# Altium PCB PCB_TLV3502.pcbdoc
Units mil, origin at the board's own origin, x right, y up, seen from the top; angles counter-clockwise.
Board outline 4512.5 x 3365 mil, 2 copper layers (Top Layer, Bottom Layer); 31 components, 17 nets, 89 pads, 22 vias.
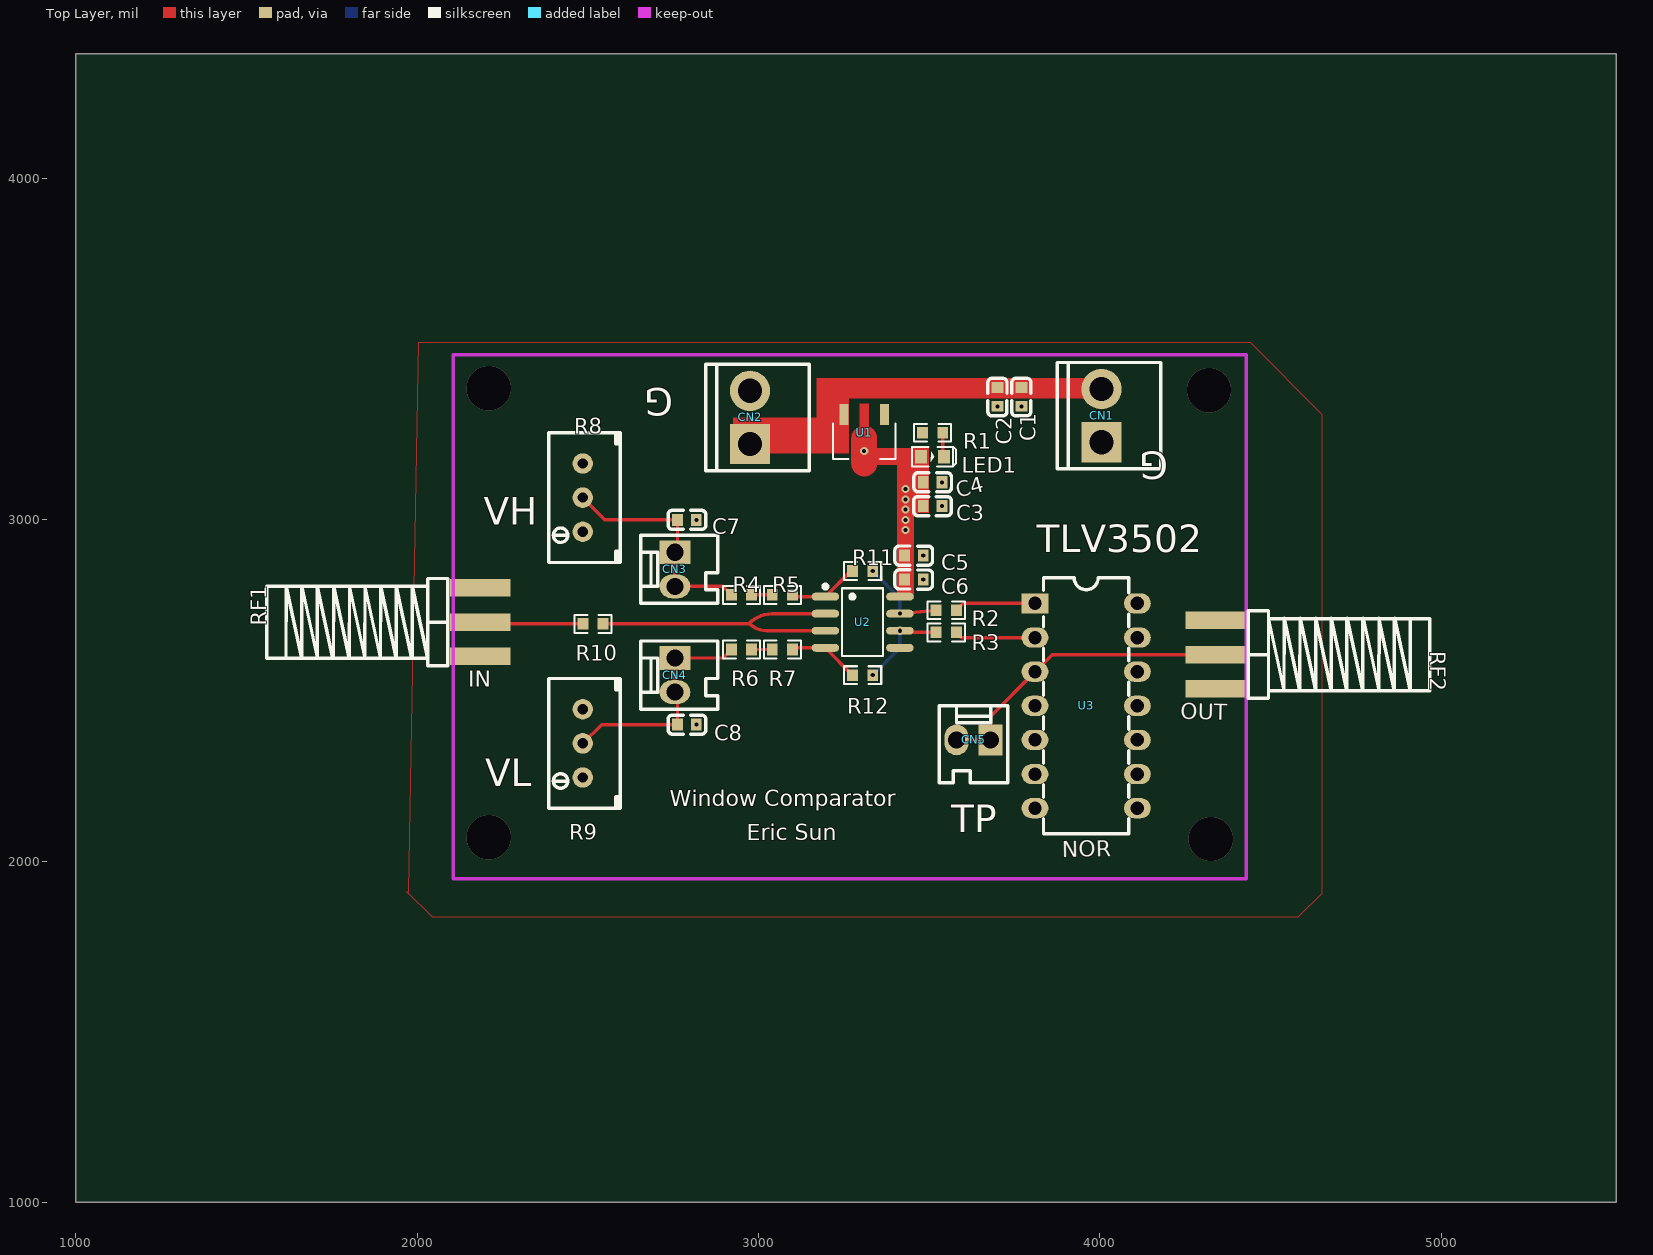
[diagram p0: Top Layer view]
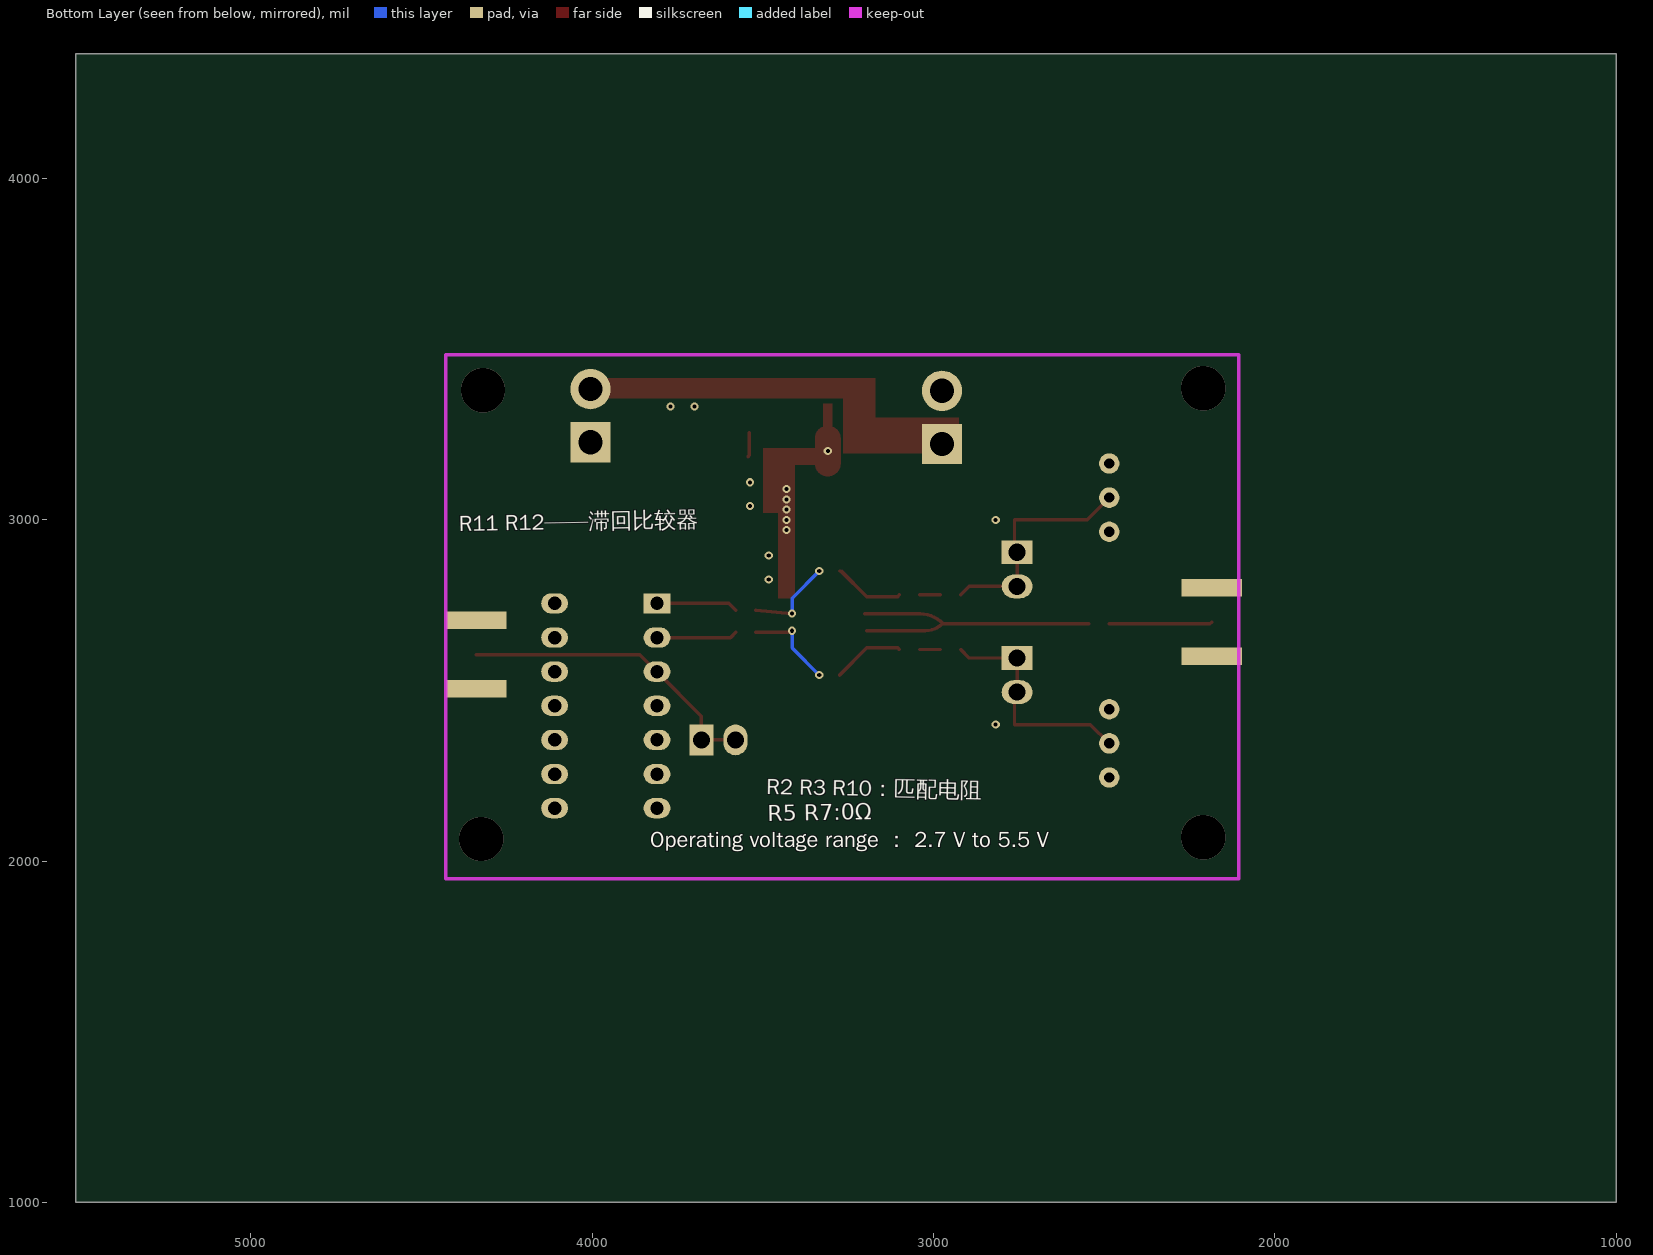
[diagram p1: Bottom Layer view, seen from below]

## Layer stack, top to bottom
Top Layer: signal copper (thickness not stored)
Dielectric: dielectric 12.6, FR-4, Dk 4.8
Bottom Layer: signal copper (thickness not stored)

## Board outline
5512.5,1000 1000,1000 1000,4365 5512.5,4365

## Components (designator, comment, footprint, x,y, rotation, side; value= is the part's Value field where it differs from the comment)
C1 "0.1u" C0603 3770,3360 r90 top
C2 "0.1u" C0603 3700,3360 r90 top
C3 "0.1u" C0603 3510,3040 r0 top
C4 "0.1u" C0603 3510,3110 r180 top
C5 "0.1u" C0603 3455,2895 r0 top
C6 "0.1u" C0603 3455,2825 r0 top
C7 "0.1u" C0603 2790,3000 r180 top
C8 "0.1u" C0603 2790,2400 r180 top
CN1 "VH-2A_C722829" CONN-TH_VH-2A 4005,3305 r90 top
CN2 "VH-2A_C722829" CONN-TH_VH-2A 2975,3300 r90 top
CN3 "A2543WV-2P" CONN-TH_A2543WV-2P 2755,2855 r90 top
CN4 "A2543WV-2P" CONN-TH_A2543WV-2P 2755,2545 r90 top
CN5 "A2543WV-2P" CONN-TH_A2543WV-2P 3630,2355 r0 top
LED1 "LED-0603_R" LED0603_RED 3510,3185 r0 top
R1 "1k" R0603 3510,3255 r180 top
R2 "1k" R0603 3550,2735 r0 top
R3 "1k" R0603 3550,2670 r0 top
R4 "1k" R0603 2950,2780 r0 top
R5 "0" R0603 3070,2780 r0 top
R6 "1k" R0603 2950,2620 r0 top
R7 "0" R0603 3070,2620 r0 top
R8 "100kΩ" RES-ADJ-TH_3296W 2485,3065 r180 top
R9 "100kΩ" RES-ADJ-TH_3296W 2485,2345 r180 top
R10 "1k" R0603 2515,2695 r0 top
R11 "1k" R0603 3305,2850 r0 top
R12 "1k" R0603 3305,2545 r0 top
RF1 "SMA-KE-P903" SMA-TH_SMA-KE-P903 2185,2700 r90 top
RF2 "SMA-KE-P903" SMA-TH_SMA-KE-P903 4340,2605 r270 top
U1 "AMS1117S-5.0" SOT-89-3_L4.5-W2.5-P1.50-LS4.2-BR 3310,3255 r90 top
U2 "TLV3502AIDR" SOIC-8_L4.9-W3.9-P1.27-LS6.0-BL 3305,2700 r270 top
U3 "CD4001BE" PDIP-14_L19.3-W6.4-P2.54-LS7.6-BL 3960,2455 r270 top

## Footprints (in the part's own frame and the unit in brackets; to place one, negate y for a bottom-side part, rotate by r counter-clockwise, add the part's x,y. Pads: shape width x height; smd on the part's side, far side on the other; paste and mask are expansions set on the pad)
C0603 [mm]
  rect 0.8x0.9 smd: 1(-0.7,0) 2(0.7,0)
  silkscreen extent -1.41,-0.71 1.39,0.72
CONN-TH_A2543WV-2P [mil]
  rect 70x90 hole 50: 1(50,0)
  oval 70x90 hole 50: 2(-50,0)
  silkscreen extent -100,-125 100,100
CONN-TH_VH-2A [mm]
  rect 3x3 hole 1.8: 1(-1.98,0)
  round 3 hole 1.8: 2(1.98,0)
  silkscreen extent -3.96,-4.4 3.96,3.3
LED0603_RED [mm]
  rect 0.9x1 smd: 1(-0.85,0) 2(0.85,0)
  silkscreen extent -1.54,-0.73 1.75,0.73
PDIP-14_L19.3-W6.4-P2.54-LS7.6-BL [mm]
  rect 1.5x2 hole 1: 1(-7.62,-3.81)
  oval 1.5x2 hole 1: 2(-5.08,-3.81) 3(-2.54,-3.81) 4(0,-3.81) 5(2.54,-3.81) 6(5.08,-3.81) 7(7.62,-3.81) 8(7.62,3.81) 9(5.08,3.81) 10(2.54,3.81) 11(0,3.81) 12(-2.54,3.81) 13(-5.08,3.81) 14(-7.62,3.81)
  silkscreen extent -9.53,-3.18 9.53,3.18
R0603 [mil]
  rect 31.75x34.02 smd: 1(-29.66,0) 2(29.66,0)
  silkscreen extent -55,-26 55,26
RES-ADJ-TH_3296W [mil]
  round 60 hole 30: 1(0,100.01) 2(0,0.01) 3(0,-99.99)
  silkscreen extent -110,-190 100,190
SMA-TH_SMA-KE-P903 [mm]
  rect 1.3x4.5 smd: 1(-2.55,0) 2(2.55,0) 5(0,0)
  rect 1.3x4.5 smd far side: 3(-2.55,0) 4(2.55,0)
  silkscreen extent -3.25,2.41 3.25,15.91
SOIC-8_L4.9-W3.9-P1.27-LS6.0-BL [mm]
  oval 0.588x2.045 smd: 1(-1.905,-2.773) 2(-0.635,-2.773) 3(0.635,-2.773) 4(1.905,-2.773) 5(1.905,2.773) 6(0.635,2.773) 7(-0.635,2.773) 8(-1.905,2.773)
  silkscreen extent -2.8,-2.92 2.53,1.52
SOT-89-3_L4.5-W2.5-P1.50-LS4.2-BR [mm]
  rect 1.575x0.672 smd: 1(1.356,-1.5) 3(1.356,1.5)
  round 0 smd: 2(-1.356,0.009)
  Top Layer region: -2.283,0.959 -0.429,0.959 -0.384,0.958 -0.34,0.955 -0.296,0.949 -0.252,0.942 -0.208,0.933 -0.165,0.921 -0.123,0.908 -0.081,0.893 -0.04,0.875 0,0.856 0.04,0.835 0.078,0.812 0.115,0.788 0.151,0.761 0.185,0.733 0.219,0.704 0.251,0.673 0.281,0.64 0.31,0.606 0.337,0.571 0.362,0.534 0.386,0.497 0.408,0.458 0.428,0.418 0.447,0.339 2.144,0.339 2.144,-0.321 0.447,-0.321 0.428,-0.401 0.408,-0.44 0.386,-0.479 0.362,-0.517 0.337,-0.553 0.31,-0.588 0.281,-0.622 0.251,-0.655 0.219,-0.686 0.185,-0.716 0.151,-0.744 0.115,-0.77 0.078,-0.795 0.04,-0.818 0,-0.839 -0.04,-0.858 -0.081,-0.875 -0.123,-0.89 -0.165,-0.904 -0.208,-0.915 -0.252,-0.925 -0.296,-0.932 -0.34,-0.937 -0.384,-0.94 -0.429,-0.941 -2.283,-0.941 -2.328,-0.94 -2.372,-0.937 -2.416,-0.932 -2.46,-0.925 -2.504,-0.915 -2.547,-0.904 -2.589,-0.89 -2.631,-0.875 -2.672,-0.858 -2.713,-0.839 -2.752,-0.818 -2.79,-0.795 -2.827,-0.77 -2.863,-0.744 -2.898,-0.716 -2.931,-0.686 -2.963,-0.655 -2.993,-0.622 -3.022,-0.588 -3.049,-0.553 -3.075,-0.517 -3.098,-0.479 -3.12,-0.44 -3.141,-0.401 -3.159,-0.36 -3.175,-0.318 -3.189,-0.276 -3.202,-0.233 -3.212,-0.19 -3.22,-0.146 -3.227,-0.102 -3.231,-0.058 -3.233,-0.013 -3.233,0.031 -3.231,0.076 -3.227,0.12 -3.22,0.164 -3.212,0.208 -3.202,0.251 -3.189,0.294 -3.175,0.336 -3.159,0.377 -3.141,0.418 -3.12,0.458 -3.098,0.497 -3.075,0.534 -3.049,0.571 -3.022,0.606 -2.993,0.64 -2.963,0.673 -2.931,0.704 -2.898,0.733 -2.863,0.761 -2.827,0.788 -2.79,0.812 -2.752,0.835 -2.713,0.856 -2.672,0.875 -2.631,0.893 -2.589,0.908 -2.547,0.921 -2.504,0.933 -2.46,0.942 -2.416,0.949 -2.372,0.955 -2.328,0.958
  silkscreen extent -1.95,-2.33 0.7,2.33

## Via types
v1: diameter 23.62, hole 11.81, Top Layer to Bottom Layer, 18 vias
v2: diameter 129.92, hole 129.92, Top Layer to Bottom Layer, 4 vias

## Nets (pads, with @x,y where several pads share a name; then routed paths per layer and width w, separated by ;. In a path a pad name is that pad's centre, name@x,y a point inside that pad or via, vN(x,y) a via of type N, cw(c..) or ccw(c..) an arc to the next point about the centre after c; other vN are vias at no path point)
+5V: C3.1 C4.2 C5.1 C6.1 LED1.1 R8.3 R9.3 U1.2 U2.8 U3.14
  other v1: 3430,2970 3430,3000 3430,3030 3430,3060 3430,3090 3309.66,3201.6
CN4_1: C8.2 CN4.1 CN4.2 R6.1 R9.2 | length 674
  Top Layer w10: R9.2 2540,2400 C8.2 2762.44,2487.56 CN4.2 CN4.1 2895.34,2595 R6.1
GND: C1.1 C2.1 C3.2 C4.1 C5.2 C6.2 C7.1 C8.1 CN1.1 CN2.2 R1.2 R8.1 R9.1 RF1.1 RF1.2 RF1.3 RF1.4 RF2.1 RF2.2 RF2.3 RF2.4 U1.1 U2.5 U3.7
  other v1: 2817.56,2400 3482.56,2825 3482.56,2895 2817.56,3000 3537.56,3040 3537.56,3110 3700,3332.44 3770,3332.44
LED1_2: LED1.2 R1.1 | length 71.6
  Top Layer w10: R1.1 3539.66,3188.8 LED1.2
R4_1: C7.2 CN3.1 CN3.2 R4.1 R8.2 | length 682.3
  Top Layer w10: R8.2 2550,3000 C7.2 2762.44,2912.44 CN3.1 ; CN3.1@2765,2905 2755,2895 CN3.2 2895.34,2805 R4.1
R4_2: R4.2 R5.1 | length 60.7
  Top Layer w10: R4.2 R5.1
R6_2: R6.2 R7.1 | length 60.7
  Top Layer w10: R6.2 R7.1
R10_1: R10.1 RF1.5 | length 302.4
  Top Layer w10: RF1.5 2189.99,2695 R10.1
U1_3: C1.2 C2.2 CN1.2 CN2.1 U1.3
U2_1: R5.2 R11.1 U2.1 | length 208.8
  Top Layer w10: R5.2 3104.66,2775 U2.1 3270.85,2850 R11.1
U2_2: R10.2 U2.2 U2.3 | length 905.3
  Top Layer w10: R10.2 2975,2695 ccw(c3023.28,2743.28) 3023.28,2675 U2.3 ; 2970.54,2695 cw(c3042.97,2622.57) 3049.46,2724.79 ; 3040,2725 U2.2@3201.85,2725
U2_4: R7.2 R12.1 U2.4 | length 211
  Top Layer w10: R7.2 3104.66,2625 U2.4 ; U2.4 R12.1
U2_6: R3.1 R12.2 U2.6 | length 270.5
  Top Layer w10: U2.6@3414.15,2675 ccw(c3426.22,2687.07) 3426.22,2670 R3.1
  Bottom Layer w10: v1(3334.66,2545) 3414.15,2624.49 v1(3414.15,2675)
U2_7: R2.1 R11.2 U2.7 | length 264.6
  Top Layer w10: v1(3414.15,2725) R2.1
  Bottom Layer w10: v1(3334.66,2850) 3414.15,2770.51 v1(3414.15,2725)
U3_1: R2.2 U3.1 | length 238.6
  Top Layer w10: R2.2 3599.66,2755 U3.1
U3_2: R3.2 U3.2 | length 236.6
  Top Layer w10: R3.2 3594.66,2655 U3.2
U3_3: CN5.1 CN5.2 RF2.5 U3.3 | length 904.6
  Top Layer w10: CN5.2 CN5.1 3680,2425 U3.3 3860.01,2605.01 RF2.5
pads on no net: U3.4 U3.5 U3.6 U3.8 U3.9 U3.10 U3.11 U3.12 U3.13
copper on no net:
  other v2: 4325,2065 2210,2070 4320,3380 2210,3385

## Polygon pours and split planes (outlines as drawn)
GND on Mid-Layer 2 (solid): 1590,3865 4825,3865 4970,3720 4970,1560 4910,1500 1555,1500 1505,1550 1500,1550
+5V on Mid-Layer 1 (solid): 1980,3600 4445,3600 4780,3265 4780,1905 4490,1615 1720,1615 1600,1735 1595,1740
GND on Top Layer (solid): 2005,3520 4440,3520 4650,3310 4650,1905 4580,1835 2045,1835 1970,1910 1975,1910

## Other copper
Top Layer:
  rectangle net U1_3: 2925,3195 3255,3300
  rectangle net U1_3: 3170,3200 3260,3340
  rectangle net U1_3: 3170,3355 3985,3415
  rectangle net U1_3: 3170,3195 3265,3375
  rectangle net +5V: 3295,3160 3500,3210
  rectangle net +5V: 3405,2770 3455,3190
  rectangle net +5V: 3405,3020 3500,3210

## Silkscreen, mask and mechanical layers (free items; w line width, h text height)
Top Overlay:
  text "G" at 2750,3385 h80 r180
  text "G" at 4200,3200 h80 r180
  text "VH" at 2195,2985 h80
  text "TLV3502" at 3815,2905 h80
  text "IN" at 2150,2495 h80
  text "OUT" at 4235,2400 h80 r359
  text "VL" at 2200,2220 h80
  text "Window Comparator" at 2740,2145 h80
  text "TP" at 3565,2085 h80
  text "Eric Sun" at 2965,2045 h80
  text "NOR" at 3890,1995 h80 r1
Bottom Overlay:
  text "R11 R12——滞回比较器" at 4390,2950 h80 r359
  text "R2 R3 R10：匹配电阻" at 3490,2180 h80 r1
  text "R5 R7:0Ω" at 3485,2100 h80 r359
  text "Operating voltage range ： 2.7 V to 5.5 V" at 3830,2025 h80